# Altium PCB MAX96724_COUPON.PcbDoc (part 2 of 3)
Units mm, origin at the board's own origin, x right, y up, seen from the top; angles counter-clockwise.
Board outline 95 x 90 mm, 4 copper layers (TOP, INT1, INT2, BOT), stack 1.586 mm thick; 171 components, 127 nets, 532 pads, 121 vias.
Unrouted connection lines stored in the file: 1.
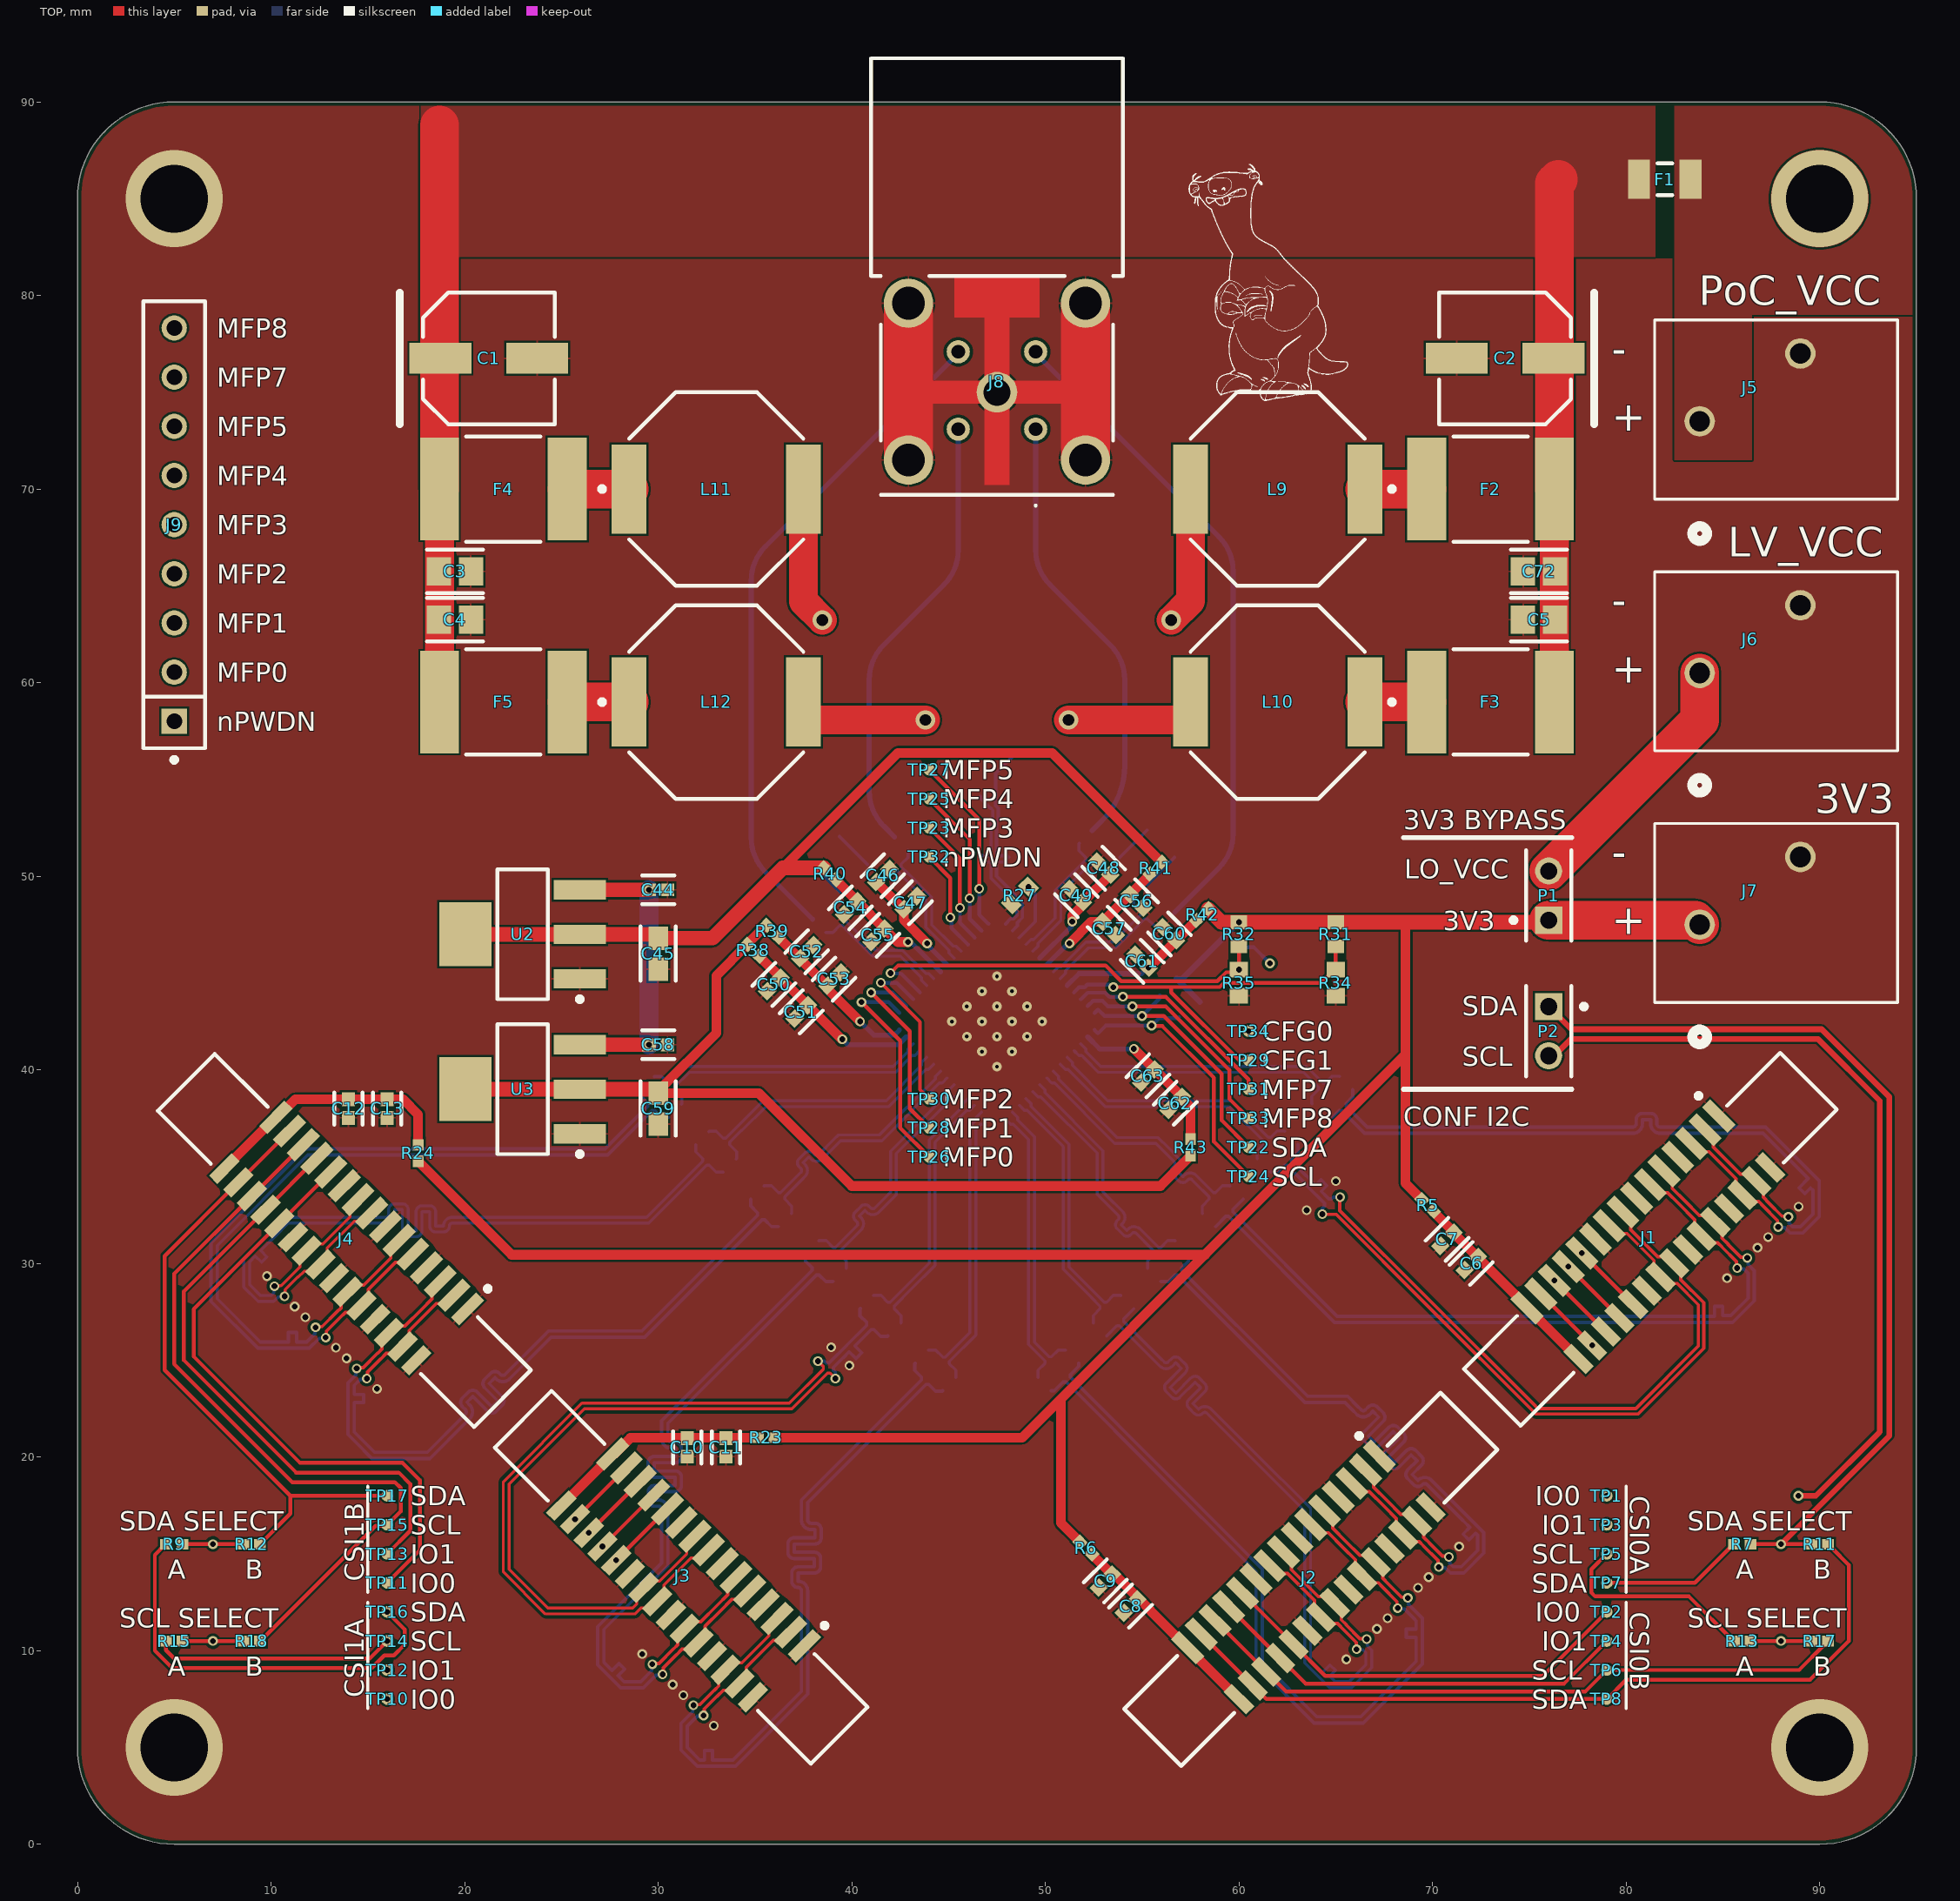
[diagram p0: TOP view]

## Via types
v1: diameter 0.5, hole 0.3, TOP to BOT, 75 vias
v2: diameter 0.5, hole 0.3, TOP to BOT, tented both sides, 22 vias
v3: diameter 0.5, hole 0.2, TOP to BOT, 16 vias
v4: diameter 1, hole 0.6, TOP to BOT, 4 vias
v5: diameter 5, hole 3.5, TOP to BOT, 4 vias

## Nets (pads, with @x,y where several pads share a name; then routed paths per layer and width w, separated by ;. In a path a pad name is that pad's centre, name@x,y a point inside that pad or via, vN(x,y) a via of type N, cw(c..) or ccw(c..) an arc to the next point about the centre after c; other vN are vias at no path point) (continued)
CSI0_CKALT_N: (continued)
  BOT w0.152: C69.1@53.162,26.251 53.7,26.789 53.826,26.789 55.757,24.857 55.918,24.697 ccw(c56.239,25.018) 56.56,24.697 56.734,24.871 ; 56.244,23.807 ccw(c56.458,23.594) 56.244,23.381 56.531,23.093 ccw(c56.745,23.307) 56.958,23.093 57.735,23.87 ; 56.245,23.808 57.021,24.584 ; 56.734,24.87 57.02,24.585 ; 57.735,23.869 58.021,23.584 ; 58.022,23.583 57.408,22.97 ccw(c57.622,22.756) 57.408,22.543 57.695,22.256 ccw(c57.909,22.469) 58.122,22.256 58.133,22.267 cw(c58.241,22.159) 58.348,22.266 60.507,20.107 63.4,17.215 63.4,9.373 64.675,8.098 65.825,8.098 66.855,9.128 66.855,10.034 66.63,10.258 66.63,10.57 v1(66.6,10.6)
CSI0_CKALT_P: C68.1 J2.9 | length 39.4
  TOP w0.172: J2.9@61.591,14.394 62.033,13.952 62.335,13.952 62.369,13.986 62.512,13.986 63.906,12.593 63.906,12.45 63.871,12.416 63.871,12.114 J2.9@64.243,11.743 64.614,11.371 64.916,11.371 64.95,11.406 65.093,11.406 65.266,11.233 65.266,11.216 66.053,10.428 66.053,10.097 v1(66.075,10.075)
  BOT w0.152: C68.1@54.577,27.666 54.039,27.128 54.039,27.002 55.971,25.071 56.131,24.91 ccw(c56.239,25.018) 56.346,24.91 56.52,25.084 ; 56.52,25.084 cw(c56.734,24.871) 56.891,25.129 56.903,25.129 56.947,25.085 ; 56.947,25.084 57.234,24.797 57.278,24.753 57.278,24.741 cw(c57.021,24.584) 57.234,24.37 56.458,23.594 56.745,23.307 57.521,24.083 ; 57.521,24.083 cw(c57.735,23.87) 57.892,24.128 57.904,24.128 57.948,24.084 58.235,23.796 58.279,23.752 58.279,23.74 cw(c58.022,23.583) 58.235,23.369 57.622,22.756 57.909,22.469 57.92,22.48 cw(c58.241,22.159) 58.51,22.524 58.517,22.524 60.721,20.321 63.702,17.34 63.702,9.498 63.756,9.444 64.315,8.885 64.699,9.27 64.986,8.983 64.691,8.687 64.978,8.4 65.085,8.4 65.7,8.4 66.553,9.253 66.553,9.909 66.417,10.045 66.105,10.045 v1(66.075,10.075)
CSI0_D0_N: C15.2 J1.2 | length 39.2
  TOP w0.172: J1.2@84.078,36.907 84.52,36.465 84.52,36.163 84.503,36.146 84.503,36.003 85.897,34.609 86.039,34.609 86.056,34.626 86.359,34.626 J1.2@86.73,34.255 87.101,33.884 87.101,33.582 87.084,33.565 87.084,33.422 87.391,33.115 87.391,33.105 88.048,32.448 88.345,32.448 v1(88.384,32.409)
  BOT w0.172: C15.2@64.455,37.565 64.471,37.55 64.824,37.55 65.169,37.895 65.312,37.895 66.481,36.726 80.1,36.726 80.347,36.726 ccw(c80.347,37.221) 80.842,37.221 80.842,37.426 81.268,37.426 81.268,37.221 ccw(c81.763,37.221) 81.763,36.726 84.2,36.726 87.068,36.726 88.253,35.541 89.048,34.746 89.109,34.686 89.41,34.384 88.937,33.911 89.238,33.609 89.531,33.902 89.653,33.78 89.653,33.533 89.653,32.547 89.003,31.897 88.599,31.897 88.423,32.073 88.423,32.37 v1(88.384,32.409)